# Altium PCB DE-150824.PcbDoc (part 2 of 2)
Units mil, origin at the board's own origin, x right, y up, seen from the top; angles counter-clockwise.
Board outline 2952.76 x 2952.76 mil, 2 copper layers (Top Layer, Bottom Layer); 84 components, 58 nets, 253 pads, 61 vias.
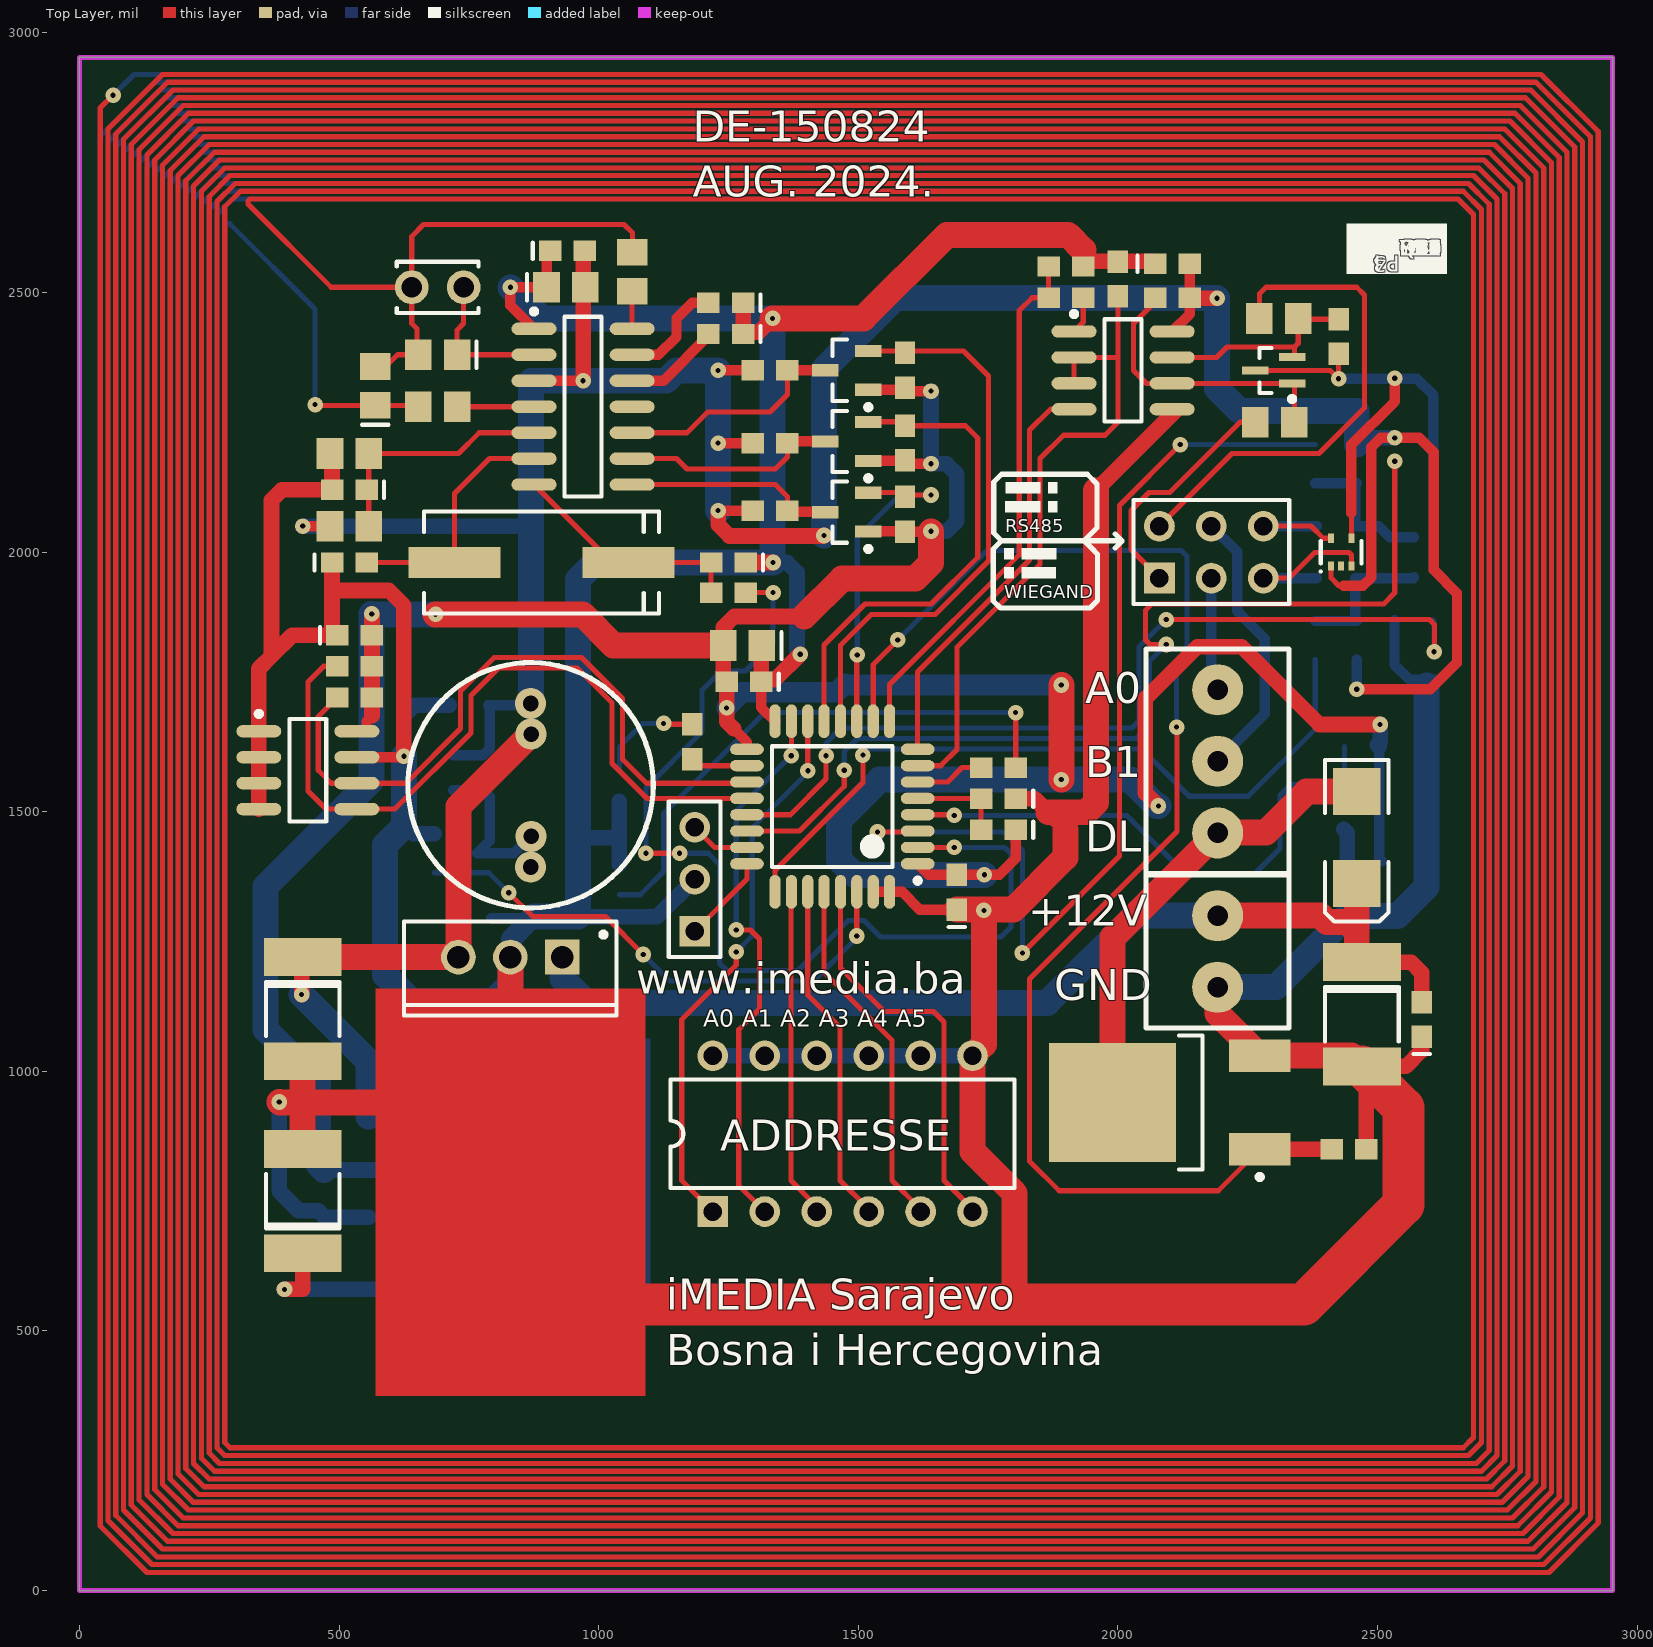
[diagram p0: Top Layer view]

## Silkscreen, mask and mechanical layers (free items; w line width, h text height) (continued)
Mechanical 1: (continued)
  lines w10: 0,1456.69 2952.76,1456.69 ; 1456.69,0 1456.69,2952.76 ; 295.28,295.28 295.28,2657.48 2657.48,2657.48 2657.48,295.28 295.28,295.28 ; 590.55,787.4 590.55,2165.35 2362.2,2165.35 2362.2,787.4 590.55,787.4

## Dimensions
0,2952.76 to 2952.76,2952.76 on Mechanical 1
2952.76,2952.76 to 2952.76,0 on Mechanical 1